# Altium PCB Breakout_10pin.PcbDoc
Units mil, origin at the board's own origin, x right, y up, seen from the top; angles counter-clockwise.
Board outline 2165.35 x 984.25 mil, 2 copper layers (Top Layer, Bottom Layer), stack 61.855 mil thick; 7 components, 10 nets, 38 pads, 0 vias.
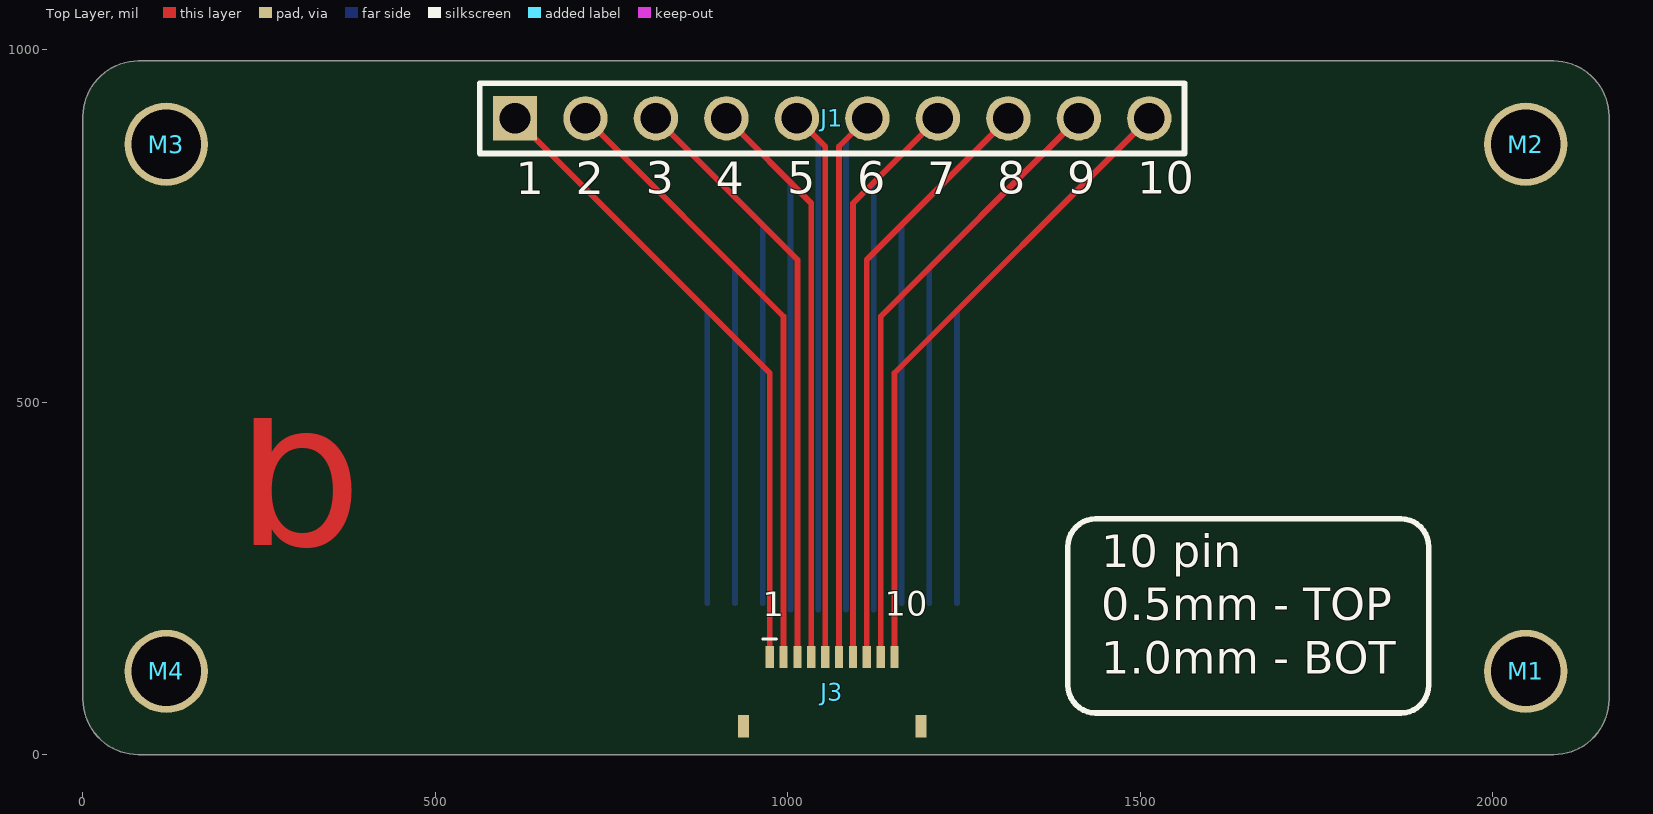
[diagram p0: Top Layer view]
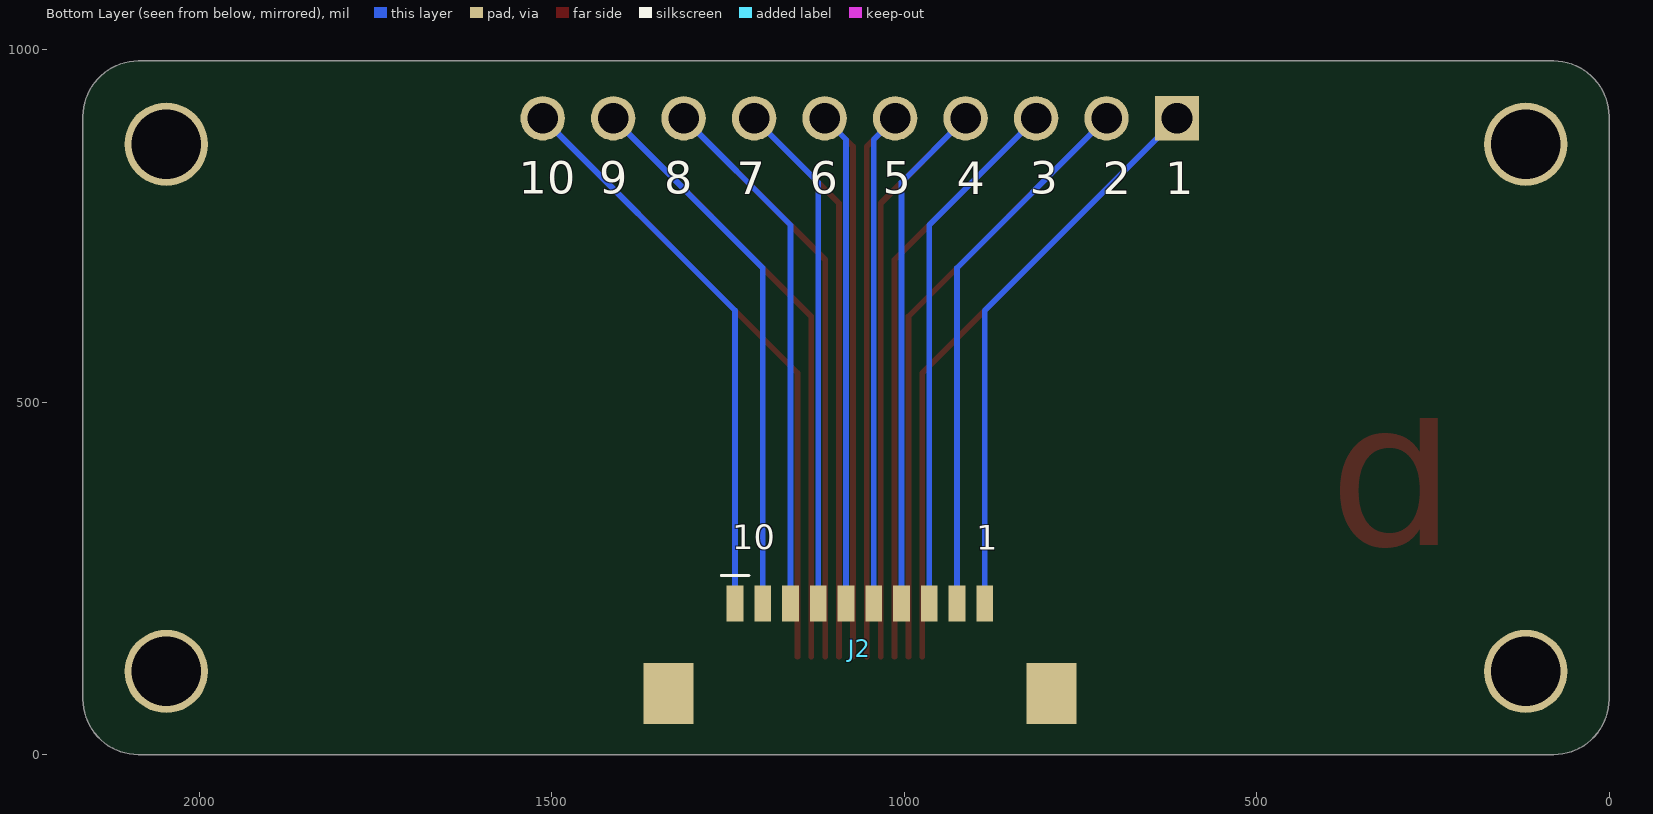
[diagram p1: Bottom Layer view, seen from below]

## Layer stack, top to bottom
Top Solder: solder mask 0.4, Solder Resist, Dk 3.5
Top Layer: signal copper 1.4
Dielectric 1: dielectric 59.0551, FR-4, Dk 4.8
Bottom Layer: signal copper 1.4
Bottom Solder: solder mask 0.4, Solder Resist, Dk 3.5

## Board outline
78.74,0 cw(c78.74,78.74) 0,78.74 0,905.51 cw(c78.74,905.51) 78.74,984.25 2086.61,984.25 cw(c2086.61,905.51) 2165.35,905.51 2165.35,78.74 cw(c2086.61,78.74) 2086.61,0

## Design rules (kind name [scope] priority, off if disabled: settings)
Clearance [All] p1: gap=8.03 ignorepadtopadclearanceinfootprint=TRUE
DiffPairsRouting [All] p1: maxlimit=10 minlimit=2.5 mostfreqgap=5 toplayer_minwidth=7 toplayer_maxwidth=18 toplayer_prefwidth=18 bottomlayer_minwidth=7 bottomlayer_maxwidth=18 bottomlayer_prefwidth=18 impedanceprofiledriven=TRUE maxuncoupledlength=500
HoleSize [All] p1: absolutevalues=TRUE maxlimit=196.85 minlimit=6.02 maxpercent=80.000 minpercent=20.000
MinimumSolderMaskSliver [All] p1: minsoldermaskwidth=7
PolygonConnect [All] p1: connectstyle=Relief reliefconductorwidth=10 reliefentries=4 polygonreliefangle="90 Angle" airgapwidth=10
RoutingVias [All] p1: holewidth=12.01 width=24.02 viastyle="Through Hole" minholewidth=10 minwidth=20 maxholewidth=19.68 maxwidth=50
SolderMaskExpansion [All] p1: expansion=4 istentingtop=FALSE
Width [All] p1: maxlimit=1000 minlimit=8.03 preferedwidth=10 minimp=50.000000 maximp=50.000000 favimp=50.000000
27 further rules are at their usual default settings.

## Components (designator, comment, footprint, x,y, rotation, side; value= is the part's Value field where it differs from the comment)
J1 "61301011121" HDR-V-10P-2.54MM 1062.99,902.96 r0 top
J2 "XF3M(1)-1015-1B" CONN-FFC-H-10P-1MM 1062.99,150.75 r180 bottom
J3 "FFC2B28-10-G" CONN-FFC-H-10P-0.5MM 1062.99,89.46 r0 top
M1 "MTG_HOLE" MH_P_2.5MM 2047.24,118.11 r90 top
M2 "MTG_HOLE" MH_P_2.5MM 2047.24,866.14 r90 top
M3 "MTG_HOLE" MH_P_2.5MM 118.11,866.14 r90 top
M4 "MTG_HOLE" MH_P_2.5MM 118.11,118.11 r90 top

## Footprints (in the part's own frame and the unit in brackets; to place one, negate y for a bottom-side part, rotate by r counter-clockwise, add the part's x,y. Pads: shape width x height; smd on the part's side, far side on the other; paste and mask are expansions set on the pad)
CONN-FFC-H-10P-0.5MM [mm]
  rect 0.3x0.8 smd: 1(-2.25,1.25) 2(-1.75,1.25) 3(-1.25,1.25) 4(-0.75,1.25) 5(-0.25,1.25) 6(0.25,1.25) 7(0.75,1.25) 8(1.25,1.25) 9(1.75,1.25) 10(2.25,1.25)
  rect 0.4x0.8 smd: ME1(-3.2,-1.25) ME2(3.2,-1.25)
  silkscreen extent -2.5,1.9 -2,1.9, body extent -3.5,-1.8 3.5,1.45, height 1.72
CONN-FFC-H-10P-1MM [mm]
  rect 0.6x1.3 smd: 1(-4.5,1.625) 2(-3.5,1.625) 3(-2.5,1.625) 4(-1.5,1.625) 5(-0.5,1.625) 6(0.5,1.625) 7(1.5,1.625) 8(2.5,1.625) 9(3.5,1.625) 10(4.5,1.625)
  rect 1.8x2.2 smd: ME1(-6.9,-1.625) ME2(6.9,-1.625)
  silkscreen extent -5,2.63 -4,2.63, body extent -7.3,-3.67 7.3,2.73, height 2
HDR-V-10P-2.54MM [mm]
  rect 1.6x1.6 hole 1.1: 1(-11.43,0)
  round 1.6 hole 1.1: 2(-8.89,0) 3(-6.35,0) 4(-3.81,0) 5(-1.27,0) 6(1.27,0) 7(3.81,0) 8(6.35,0) 9(8.89,0) 10(11.43,0)
  silkscreen extent -12.7,-1.27 12.7,1.27, body extent -12.7,-1.27 12.7,1.27, height 8.55
MH_P_2.5MM [mm]
  round 3 hole 2.5: 1(0,0)

## Part data
J1: library part HDR-V-1X10-M-2.54MM, "THT Vertical Pin Header WR-PHD, Pitch 2.54 mm, Single Row, 10 pins", Color=Black, Current Rating=3A, Flammability Rating="UL94 V-0", Insulation Resistance=1GR, Manufacturer 1="Wurth Electronics", Max Operating Temperature=105°C, Min Operating Temperature=-40°C, Supplier Part Number=16T0627, Voltage Rating=250V, Category="Headers and Wire Housings", ComponentLink1Description=https://datasheet.ciiva.com/738/6130xx11121-738550.pdf?src-supplier=Digi-Key, ComponentLink1URL=https://datasheet.ciiva.com/738/6130xx11121-738550.pdf?src-supplier=Digi-Key, ComponentLink2Description=https://datasheet.ciiva.com/7631/1442175-7631321.pdf?src-supplier=Element14, ComponentLink2URL=https://datasheet.ciiva.com/7631/1442175-7631321.pdf?src-supplier=Element14, ComponentLink3Description=https://datasheet.ciiva.com/48700/001088187-da-01-en-wr-phd-tht-stiftleiste-61301011121-48700876.pdf?src-supplier=Conrad, ComponentLink3URL=https://datasheet.ciiva.com/48700/001088187-da-01-en-wr-phd-tht-stiftleiste-61301011121-48700876.pdf?src-supplier=Conrad, Connector Type=Header, Contact Finish - Mating=GOLD, Contact Gender=Male, Contact Material="Copper Alloy,Copper", Contact Plating=Gold, Contact Shape=Square, Contact Type="Male Pin", Fastening Type=Pull, Gender=Male, Height=11.54mm, Housing Material=PBT, Insulation Color=Black, Insulation Material=Nylon, Length=2.54mm, Manufacturer Part Number 1=61301011121, Mounting Technology="Through Hole", Number of Contacts=10, Number of Positions=10, Number of Rows=1, Orientation=Straight, Packaging=Bulk, Pitch=2.54mm, Pricing="1=0.65, 10=0.65, 25=0.65, 50=0.65, 100=0.6 (USD)", Reach SVHC Compliant=Unknown, RoHS=Yes, RoHS Compliant=Yes, Series=WR-PHD, Stock=997, Supplier=Newark, Termination=Solder, Width=25.4mm
J2: library part CONN-FFC-H-10P-1MM, "1.0-mm Pitch, Dual Contact ; For FPC/FFC, 10 Contacts, RoHS", Actuator Color=Black, Current Rating=500mA, Flammability Rating="UL94 V-0", Housing Color=Natural, Manufacturer 1=Omron, Max Operating Temperature=85°C, Min Operating Temperature=-30°C, Package Quantity=1500, Voltage Rating=50V, Actuator Material="Polymer,Liquid Crystal Polymer", Category="FFC / FPC", ComponentLink1Description=https://datasheet.ciiva.com/48563/en-xf3m-48563769.pdf?src-supplier=Avnet, ComponentLink1URL=https://datasheet.ciiva.com/48563/en-xf3m-48563769.pdf?src-supplier=Avnet, Contact Material="Copper Alloy", Contact Plating=Gold, Housing Material=Polymer, Manufacturer Part Number 1=XF3M(1)-1015-1B, Mating Cycles=20, Mounting Technology="Surface Mount", Number of Contacts=10, Number of Positions=10, Number of Rows=1, Orientation="Right Angle", Packaging="Tape and Reel", Pitch=0.039inch, Pricing="1=0.915, 10=0.8221, 25=0.8139, 50=0.8057, 100=0.7768, 250=0.7566, 500=0.719, 1000=0.5891 (USD)", Radiation Hardening=No, RoHS=Yes, RoHS Compliant=Yes, Series=XF3M, Stock=1, Supplier="Arrow Electronics", Supplier Part Number=XF3M(1)-1015-1B, Termination=Solder
J3: library part CONN-FFC-H-10P-0.5MM, "CONN, FPC, 10POS, 1ROW, 0.5MM, R/A SMT; Pitch Spacing: 0.5mm; No. of Contacts: 10Contacts; Gender: Receptacle;...", Manufacturer 1="Global Connector Technology", Supplier Part Number=90AJ6008, Category=Connectors, Manufacturer Part Number 1=FFC2B28-10-G, Pricing="1=0.515, 250=0.397, 500=0.357, 1000=0.325, 4000=0.325, 5000=0.298 (USD)", RoHS=No, Stock=3980, Supplier=Newark
M1 M2 M3 M4: "MTG HOLE PLATED VARIOUS SIZES"

## Nets (pads, with @x,y where several pads share a name; then routed paths per layer and width w, separated by ;. In a path a pad name is that pad's centre, name@x,y a point inside that pad or via, vN(x,y) a via of type N, cw(c..) or ccw(c..) an arc to the next point about the centre after c; other vN are vias at no path point)
NetJ1_1: J1.1 J2.10 J3.1 | length 1715.2
  Top Layer w8.03: J1.1 974.41,541.54 J3.1
  Bottom Layer w8.03: J1.1 885.83,630.12 J2.10
NetJ1_2: J1.2 J2.9 J3.2 | length 1656.9
  Top Layer w8.03: J1.2 994.09,621.85 J3.2
  Bottom Layer w8.03: J1.2 925.2,690.75 J2.9
NetJ1_3: J1.3 J2.8 J3.3 | length 1598.5
  Top Layer w8.03: J1.3 1013.78,702.17 J3.3
  Bottom Layer w8.03: J1.3 964.57,751.38 J2.8
NetJ1_4: J1.4 J2.7 J3.4 | length 1548.9
  Top Layer w8.03: J1.4 1033.46,782.48 J3.4
  Bottom Layer w8.03: J1.4 1003.94,812.01 J2.7@1003.94,205.87
NetJ1_5: J1.5 J2.6 J3.5 | length 1490.6
  Top Layer w8.03: J1.5 1053.15,862.8 J3.5
  Bottom Layer w8.03: J1.5 1043.31,872.64 J2.6@1043.31,205.87
NetJ1_6: J1.6 J2.5 J3.6 | length 1490.6
  Top Layer w8.03: J3.6 1072.83,862.8 J1.6
  Bottom Layer w8.03: J2.5@1082.68,205.87 1082.68,872.64 J1.6
NetJ1_7: J1.7 J2.4 J3.7 | length 1548.9
  Top Layer w8.03: J3.7 1092.52,782.48 J1.7
  Bottom Layer w8.03: J2.4@1122.05,205.87 1122.05,812.01 J1.7
NetJ1_8: J1.8 J2.3 J3.8 | length 1598.5
  Top Layer w8.03: J3.8 1112.2,702.17 J1.8
  Bottom Layer w8.03: J2.3 1161.42,751.38 J1.8
NetJ1_9: J1.9 J2.2 J3.9 | length 1656.9
  Top Layer w8.03: J3.9 1131.89,621.85 J1.9
  Bottom Layer w8.03: J2.2 1200.79,690.75 J1.9
NetJ1_10: J1.10 J2.1 J3.10 | length 1715.2
  Top Layer w8.03: J3.10 1151.57,541.54 J1.10
  Bottom Layer w8.03: J2.1 1240.16,630.12 J1.10
pads on no net: J2.ME1 J2.ME2 J3.ME1 J3.ME2 M1.1 M2.1 M3.1 M4.1

## Other copper
Top Layer:
  text "b" at 216.54,192.91 h550

## Silkscreen, mask and mechanical layers (free items; w line width, h text height)
Top Overlay:
  lines w7.87: 1397.64,98.43 ccw(c1437.01,98.43) 1437.01,59.06 1870.08,59.06 ccw(c1870.08,98.43) 1909.45,98.43 1909.45,295.28 ccw(c1870.08,295.28) 1870.08,334.65 1437.01,334.65 ccw(c1437.01,295.28) 1397.64,295.28 1397.64,98.43 ; 1397.64,98.43 1397.64,98.43
  text "1" at 614.17,779.53 h78.74
  text "2" at 698.99,779.53 h78.74
  text "3" at 798.56,780.36 h78.74
  text "4" at 897.84,779.53 h78.74
  text "5" at 998.98,780.36 h78.74
  text "6" at 1098.7,780.36 h78.74
  text "7" at 1198.28,779.53 h78.74
  text "8" at 1297.16,780.36 h78.74
  text "9" at 1396.64,780.36 h78.74
  text "10" at 1496.06,780.36 h78.74
  text "10 pin" at 1444.88,250.24 h78.74
  text "10" at 1137.8,185.67 h59.06
  text "1" at 964.57,185.04 h59.06
  text "0.5mm - TOP" at 1444.88,174.73 h78.74
  text "1.0mm - BOT" at 1444.88,99.26 h78.74
  text "c" at 124.75,-458.4 h1968.5
Bottom Overlay:
  text "1" at 629.92,779.53 h78.74
  text "2" at 718.67,779.53 h78.74
  text "3" at 822.18,780.36 h78.74
  text "4" at 925.4,779.53 h78.74
  text "5" at 1030.48,780.36 h78.74
  text "6" at 1134.14,780.36 h78.74
  text "7" at 1237.65,779.53 h78.74
  text "8" at 1340.47,780.36 h78.74
  text "9" at 1433.07,780.36 h78.74
  text "10" at 1547.24,780.36 h78.74
  text "1" at 897.64,279.53 h59.06
  text "10" at 1244.09,280.15 h59.06
Board Outline:
  lines w3.94: 1062.99,984.25 1082.68,984.25 ; 0,78.74 ccw(c78.74,78.74) 78.74,0 2086.61,0 ccw(c2086.61,78.74) 2165.35,78.74 2165.35,905.51 ccw(c2086.61,905.51) 2086.61,984.25 78.74,984.25 ccw(c78.74,905.51) 0,905.51 0,78.74